# Altium PCB TEMPLATE_PCB_2L.PcbDoc
Units mm, origin at the board's own origin, x right, y up, seen from the top; angles counter-clockwise.
Board outline 50 x 50 mm, 2 copper layers (Top, Bottom), stack 1.54 mm thick; 27 components, 24 nets, 143 pads, 54 vias.
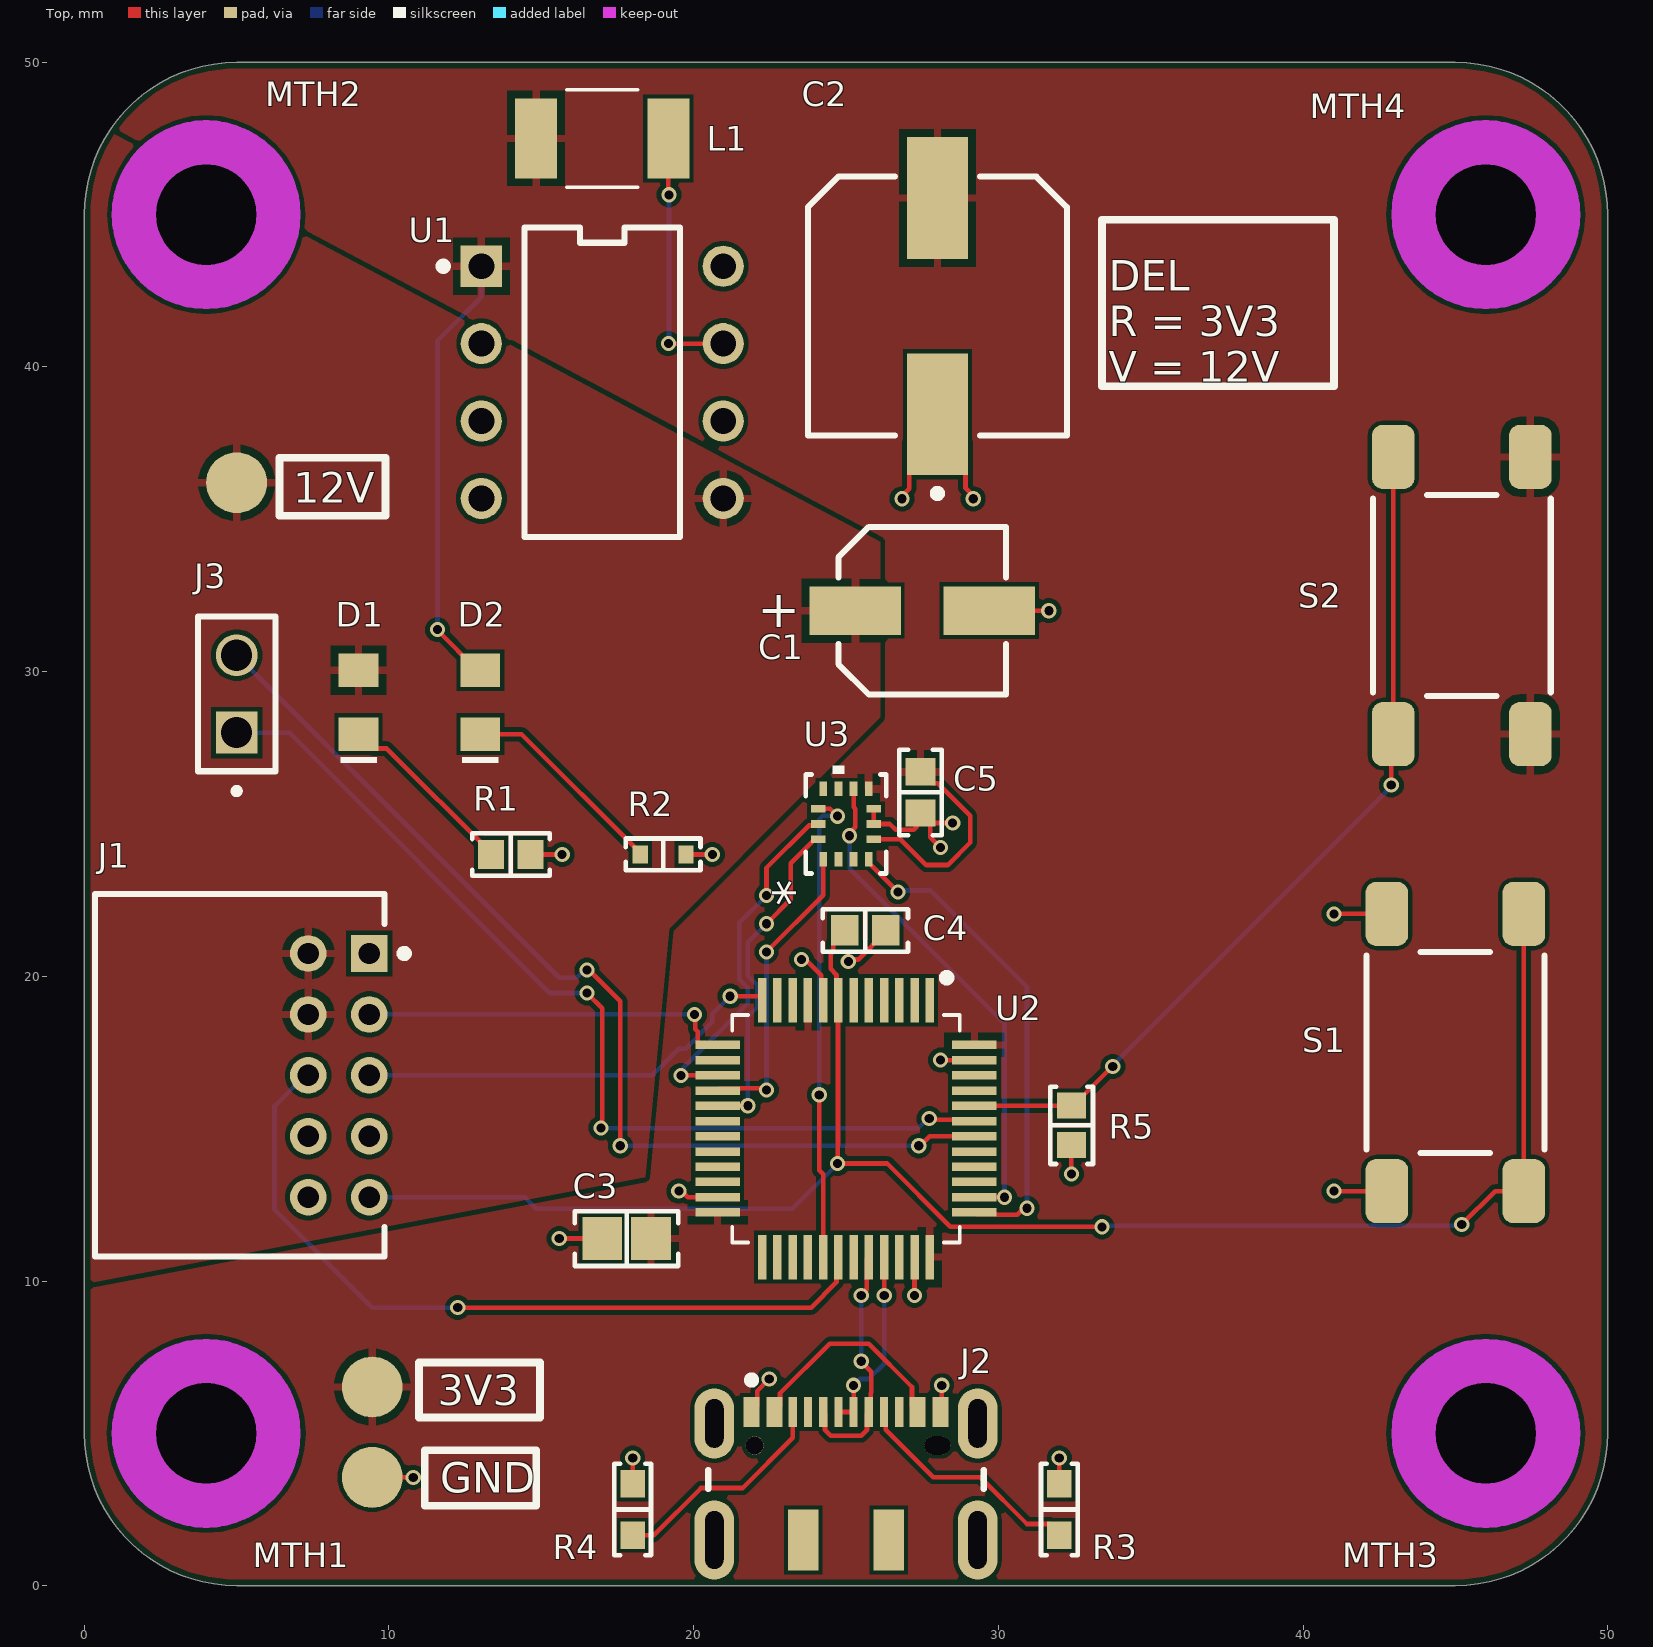
[diagram p0: Top view]
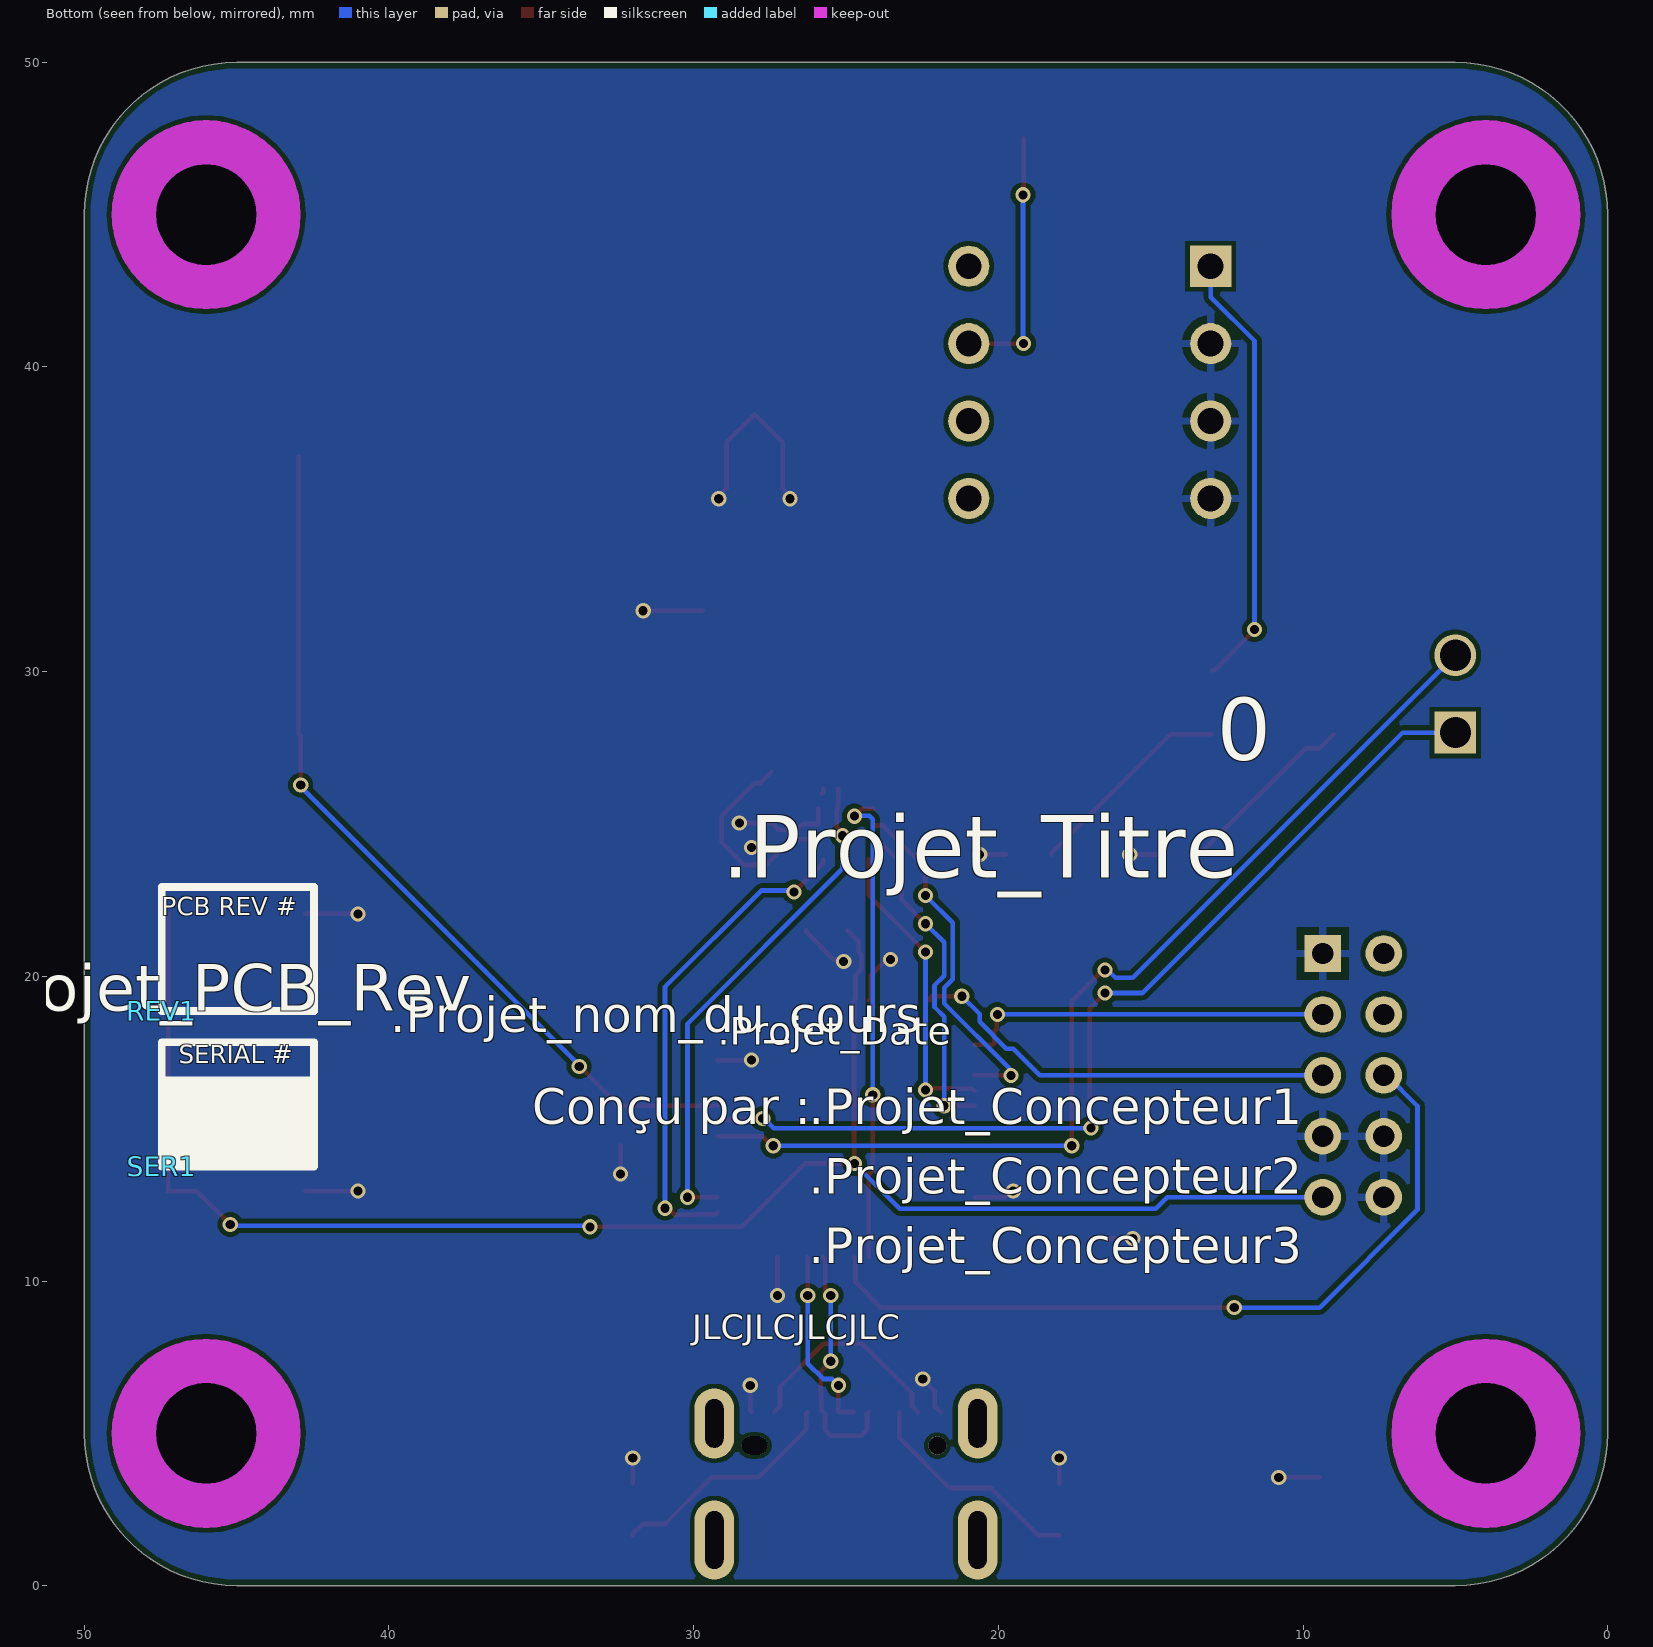
[diagram p1: Bottom view, seen from below]
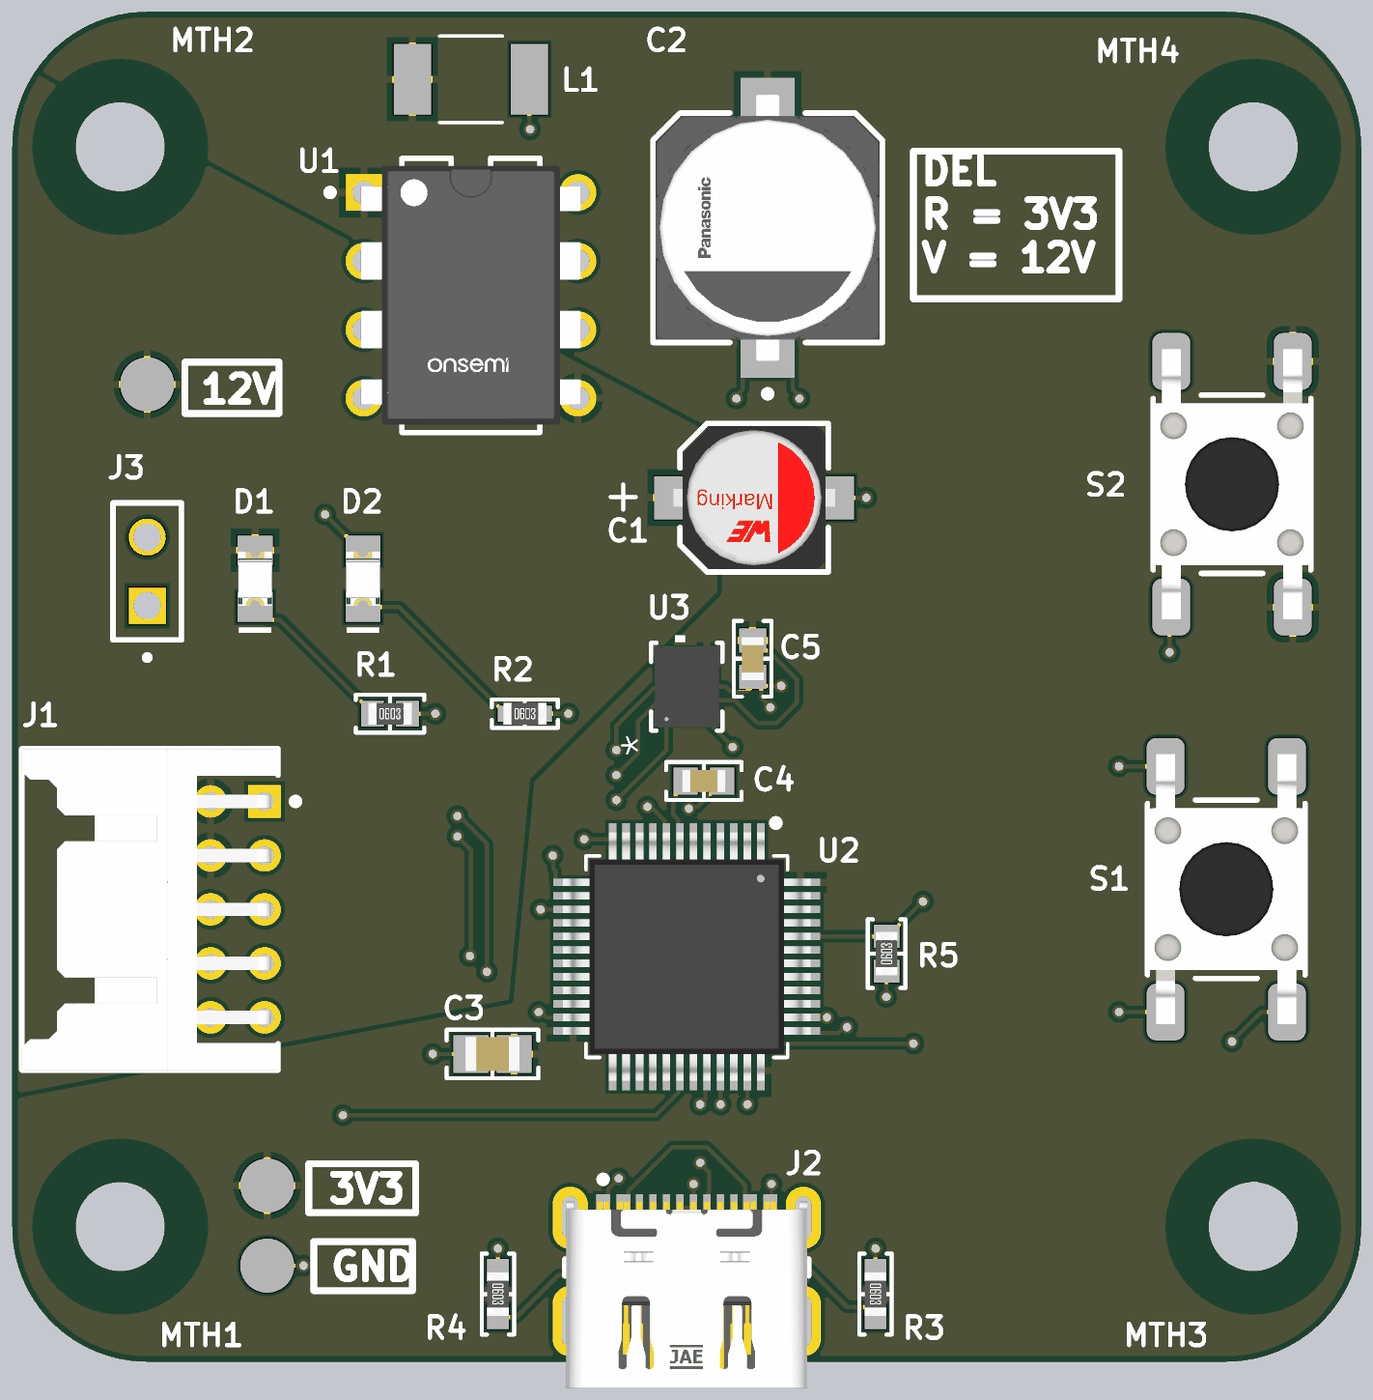
[diagram p2: 3D render of the assembled board from above, using the file's embedded part models]

## Layer stack, top to bottom
Top Solder: solder mask 0.0102, Solder Resist, Dk 3.5
Top: signal copper 0.035
Dielectric 1: core 1.47, FR-4, Dk 4.6
Bottom: signal copper 0.035
Bottom Solder: solder mask 0.0102, Solder Resist, Dk 3.5

## Board outline
0,5 0,45 cw(c5,45) 5,50 45,50 cw(c45,45) 50,45 50,5 cw(c45,5) 45,0 5,0 cw(c5,5)

## Design rules (kind name [scope] priority, off if disabled: settings)
BoardOutlineClearance [All] p1: gap=0.2 ignorepadtopadclearanceinfootprint=FALSE except(0: Arc-SplitContinuation Track-SplitContinuation SMDPad-SplitContinuation THPad-SplitContinuation Via-SplitContinuation Fill-SplitContinuation Poly-SplitContinuation Region-SplitContinuation Text-SplitContinuation)
Clearance "Schematic Clearance Constraint_1" [InComponent('SER1')] p1: gap=0.254 ignorepadtopadclearanceinfootprint=FALSE except(0: Arc-Text Track-Text Text-Text)
Clearance "Schematic Clearance Constraint" [InComponent('REV1')] p2: gap=0.254 ignorepadtopadclearanceinfootprint=FALSE except(0: Arc-Text Track-Text Text-Text)
Clearance [All] p3: gap=0.152 ignorepadtopadclearanceinfootprint=FALSE except(0.127: Arc-Arc Arc-Track Arc-Hole Track-Track Track-Hole SMDPad-Fill SMDPad-Poly SMDPad-Region SMDPad-Hole THPad-Hole Via-Hole Fill-Hole Poly-Hole Region-Hole Text-Hole; 0.2: Arc-SMDPad Track-SMDPad; 0.254: Arc-Via Track-Via Via-Via; 0.33: Arc-THPad Track-THPad; 0.5: THPad-THPad)
ComponentClearance "Schematic Component Clearance Constraint_1" [InComponent('SER1')] p1: gap=0 collisioncheckmode=3 verticalgap=0 showdistances=FALSE
ComponentClearance "Schematic Component Clearance Constraint" [InComponent('REV1')] p2: gap=0 collisioncheckmode=3 verticalgap=0 showdistances=FALSE
ComponentClearance [All] p3: gap=0.102 collisioncheckmode=3 verticalgap=0.102 showdistances=FALSE
HoleSize [All] p1: absolutevalues=TRUE maxlimit=6.3 minlimit=0.3 maxpercent=80.000 minpercent=20.000
HoleToHoleClearance [All] p1: gap=0.45 allowstackedmicrovias=FALSE
MinimumAnnularRing [All] p1: minimumring=0.1
MinimumSolderMaskSliver [All] p1: minsoldermaskwidth=0.1
PlaneClearance [All] p1: clearance=0.152
PlaneConnect [All] p1: pad.planeconnectstyle=Relief pad.reliefexpansion=0.508 pad.reliefentries=4 pad.reliefconductorwidth=0.254 pad.reliefairgap=0.254 via.planeconnectstyle=Direct via.reliefexpansion=0.508 via.reliefentries=4 via.reliefconductorwidth=0.254 via.reliefairgap=0.254
PolygonConnect [All] p1: thpad.connectstyle=Relief thpad.reliefconductorwidth=0.254 thpad.reliefentries=4 thpad.polygonreliefangle="90 Angle" thpad.airgapwidth=0.254 smdpad.connectstyle=Relief smdpad.reliefconductorwidth=0.254 smdpad.reliefentries=4 smdpad.polygonreliefangle="90 Angle" smdpad.airgapwidth=0.254 via.connectstyle=Direct via.reliefconductorwidth=0.254 via.reliefentries=4 via.polygonreliefangle="90 Angle" via.airgapwidth=0.254
RoutingVias [All] p1: holewidth=0.3 width=0.5 viastyle="Through Hole" minholewidth=0.3 minwidth=0.5 maxholewidth=6.3 maxwidth=6.5
SilkToSilkClearance [All] p1: silktosilkclearance=0.102
SilkToSolderMaskClearance [IsPad] p1: minsilkscreentomaskgap=0.024 clearancetoexposedcopper=FALSE
SolderMaskExpansion SolderMaskExpansion_Via [isVia] p1: expansion=0.102 istentingtop=TRUE
SolderMaskExpansion [All] p2: expansion=0.051 istentingtop=FALSE
SupplyNets "Schematic Supply Nets_3" [InNet('3V3')] p1: voltage=0.000
SupplyNets "Schematic Supply Nets_2" [InNet('VUSB')] p2: voltage=0.000
SupplyNets "Schematic Supply Nets_1" [InNet('GND')] p3: voltage=0.000
SupplyNets "Schematic Supply Nets" [InNet('12V')] p4: voltage=0.000
Width [All] p1: maxlimit=25.4 minlimit=0.127 preferedwidth=0.152 minimp=50.000000 maximp=50.000000 favimp=50.000000
22 further rules are at their usual default settings.

## Classes and differential pairs
component class TEMPLATE_Title: REV1 SER1

## Components (designator, comment, footprint, x,y, rotation, side; value= is the part's Value field where it differs from the comment)
C1 "865080442004" WCAP-ASLI_D5H5.5 27.5,32 r180 top
C2 "EEE-1EA221UP" FP-SF-MFG 28,42 r90 top
C3 "1µF" "CAP 0805_2012" 17.8,11.393 r0 top
C4 "0.1 µF" "CAP 0603_1608" 25.635,21.508 r180 top
C5 "0.1 µF" "CAP 0603_1608" 27.445,26.037 r90 top
D1 "150080GS75000" WL-SMCW_0805_150080xx75000 9,29 r90 top
D2 "150080RS75000" WL-SMCW_0805_150080xx75000 13,29 r90 top
J1 "S10B-PHDSS (LF)(SN)" FP-S10B-PHDSS_LF_SN-MFG 5.1,16.75 r90 top
J2 "DX07S016JA1R1500" FP-DX07S016JA1R1500-MFG 25,2.5 r0 top
J3 "TSW-102-23-T-S" SAMTEC_TSW-102-23-T-S 5,28 r90 top
L1 "B82432C1334K000" INDM4532X340N 17,47.5 r180 top
MTH1 "MTH_M3_NON_PLATED" MTH_M3_NON_PLATED 4,5 r0 top
MTH2 "MTH_M3_NON_PLATED" MTH_M3_NON_PLATED 4,45 r0 top
MTH3 "MTH_M3_NON_PLATED" MTH_M3_NON_PLATED 46,5 r0 top
MTH4 "MTH_M3_NON_PLATED" MTH_M3_NON_PLATED 46,45 r0 top
R1 "2 kOhms" "RES 0603_1608" 14,24 r0 top
R2 "270 Ohms" "KOA RES RK73 RN73 0603_1608" 19,24 r0 top
R3 "5.1 kOhms" "YAGEO RES 0603_1608" 32,2.5 r270 top
R4 "5.1 kOhms" "YAGEO RES 0603_1608" 18,2.5 r270 top
R5 "" "RES 0603_1608" 32.408,15.11 r90 top value="100 kOhms"
REV1 "Revision Cartridge Mini" REV_REVISION_CARTRIDGE_MINI 47.462,18.861 r180 bottom
S1 "FSM4JSMA" "TE FSM4JSMA" 45,17.5 r180 top
S2 "FSM4JSMA" "TE FSM4JSMA" 45.212,32.5 r0 top
SER1 "Serial Cartridge MICRO" SER_SERIAL_CARTRIDGE_MICRO 47.462,13.76 r180 bottom
U1 "LM2574N-ADJG" FP-626-05-MFG 17,39.497 r0 top
U2 "STM32U083CCT6" STM32U083CCT6-Footprint-1 25,15 r270 top
U3 "BMI323" BMI323_BOS 25,25 r90 top

## Footprints (in the part's own frame and the unit in brackets; to place one, negate y for a bottom-side part, rotate by r counter-clockwise, add the part's x,y. Pads: shape width x height; smd on the part's side, far side on the other; paste and mask are expansions set on the pad)
BMI323_BOS [mil]
  rect 19x10 smd paste+0 mask+0: 1(-45.5,29.53) 2(-45.5,9.84) 3(-45.5,-9.84) 4(-45.5,-29.53) 8(45.5,-29.53) 9(45.5,-9.84) 10(45.5,9.84) 11(45.5,29.53)
  rect 10x19 smd paste+0 mask+0: 5(-19.69,-36) 6(0,-36) 7(19.69,-36) 12(19.69,36) 13(0,36) 14(-19.69,36)
  silkscreen extent -64,-52 75,52, body extent -59,-47 59,47, height 34
"CAP 0603_1608" [mm] "Chip Capacitor, 2-Leads, Body 1.60x0.80mm, IPC Medium Density"
  rect 0.9x1 smd: 1(-0.675,0) 2(0.675,0)
  silkscreen extent -1.4,-0.7 1.4,0.7, body extent -0.8,-0.41 0.8,0.41, height 0.82
"CAP 0805_2012" [mm] "Chip Capacitor, 2-Leads, Body 2.00x1.20mm, IPC Medium Density"
  rect 1.3x1.4 smd: 1(-0.8,0) 2(0.8,0)
  silkscreen extent -1.7,-0.9 1.7,0.9, body extent -1,-0.64 1,0.64, height 1.26
FP-626-05-MFG [mm]
  rect 1.35x1.35 hole 0.85 paste-2539.97 mask+0: 1(-3.97,3.81)
  round 1.35 hole 0.85 paste-2539.97 mask+0: 2(-3.97,1.27) 3(-3.97,-1.27) 4(-3.97,-3.81) 5(3.97,-3.81) 6(3.97,-1.27) 7(3.97,1.27) 8(3.97,3.81)
  silkscreen extent -5.34,-5.08 2.56,5.08, body extent -4.08,-4.79 4.08,4.79, height 5.33
FP-DX07S016JA1R1500-MFG [mm]
  rrect100% 1.3x2.3 hole 1.6 slot 0.6 at 0 deg paste-2539.97 mask+0: 1(-4.32,2.825) 2(4.32,2.825)
  rrect100% 1.3x2.6 hole 1.9 slot 0.6 at 0 deg paste-2539.97 mask+0: 3(-4.32,-1) 6(4.32,-1)
  rect 1x2 smd paste+0 mask+0: 4(-1.4,-1) 5(1.4,-1)
  rect 0.52x1 smd paste+0 mask+0: A1/B12(-3.1,3.2) A4/B9(-2.35,3.2) A12/B1(3.1,3.2) B4/A9(2.35,3.2)
  rect 0.27x1 smd paste+0 mask+0: A5(-1.75,3.2) A6(-0.25,3.2) A7(0.75,3.2) A8(1.75,3.2) B5(1.25,3.2) B6(0.25,3.2) B7(-0.75,3.2) B8(-1.25,3.2)
  round 0.6 hole 0.6 unplated paste-2539.97 mask+0: ""(-3,2.1)
  rrect100% 0.85x0.6 hole 0.6 slot 0.85 at 0 deg unplated paste-2539.97 mask+0: ""(3,2.1)
  silkscreen extent -4.52,0.67 4.52,4.37, body extent -5.07,-3.75 5.07,4.08, height 0.25
FP-S10B-PHDSS_LF_SN-MFG [mm]
  rect 1.2x1.2 hole 0.7 paste-2539.97 mask+0: 1(4,-4.25)
  round 1.2 hole 0.7 paste-2539.97 mask+0: 2(4,-2.25) 3(2,-4.25) 4(2,-2.25) 5(0,-4.25) 6(0,-2.25) 7(-2,-4.25) 8(-2,-2.25) 9(-4,-4.25) 10(-4,-2.25)
  silkscreen extent -5.95,-5.53 5.95,4.75, body extent -6.05,-4.95 6.05,4.85, height 0.25
FP-SF-MFG [mm]
  rect 4x2 smd paste+0 mask+0: 1(-3.55,0) 2(3.55,0)
  silkscreen extent -6.27,-4.25 4.25,4.25, body extent -5.8,-4.5 5.8,4.5, height 0.25
INDM4532X340N [mm]
  rect 1.38x2.61 smd: 1(-2.17,0) 2(2.17,0)
  silkscreen extent -1.16,-1.6 1.16,1.6
"KOA RES RK73 RN73 0603_1608" [mm] "Chip Resistor, 2-Leads, Body 1.60x0.80mm"
  rect 0.5x0.6 smd: 1(-0.75,0) 2(0.75,0)
  silkscreen extent -1.22,-0.52 1.22,0.52, body extent -0.8,-0.4 0.8,0.4, height 0.45
MTH_M3_NON_PLATED [mm] "Mounting Hole Metric M3 NON_PLATED"
  round 0 hole 3.3 unplated paste-2539.97 mask+0.07: 1(0,0)
  Top keep-out circle w1.45: c0,0 r2.375
  Bottom keep-out circle w1.45: c0,0 r2.375
"RES 0603_1608" [mm] "Chip Resistor, 2-Leads, Body 1.60x0.80mm, IPC Medium Density"
  rect 0.85x0.95 smd: 1(-0.65,0) 2(0.65,0)
  silkscreen extent -1.27,-0.7 1.27,0.7, body extent -0.8,-0.4 0.8,0.4, height 0.45
REV_REVISION_CARTRIDGE_MINI [mm]
  silkscreen extent 0,0 5,4.08
SAMTEC_TSW-102-23-T-S [mm]
  rect 1.37x1.37 hole 1.02: 01(0,0)
  round 1.37 hole 1.02: 02(2.54,0)
  silkscreen extent -2.02,-1.27 3.81,1.27
SER_SERIAL_CARTRIDGE_MICRO [mm]
  silkscreen extent 0,0 5.02,4.08
STM32U083CCT6-Footprint-1 [mil]
  rect 57.56x11 smd paste+0 mask+0: 1(-166,108.27) 2(-166,88.58) 3(-166,68.9) 4(-166,49.21) 5(-166,29.53) 6(-166,9.84) 7(-166,-9.84) 8(-166,-29.53) 9(-166,-49.21) 10(-166,-68.9) 11(-166,-88.58) 12(-166,-108.27) 25(166,-108.27) 26(166,-88.58) 27(166,-68.9) 28(166,-49.21) 29(166,-29.53) 30(166,-9.84) 31(166,9.84) 32(166,29.53) 33(166,49.21) 34(166,68.9) 35(166,88.58) 36(166,108.27)
  rect 11x57.56 smd paste+0 mask+0: 13(-108.27,-166) 14(-88.58,-166) 15(-68.9,-166) 16(-49.21,-166) 17(-29.53,-166) 18(-9.84,-166) 19(9.84,-166) 20(29.53,-166) 21(49.21,-166) 22(68.9,-166) 23(88.58,-166) 24(108.27,-166) 37(108.27,166) 38(88.58,166) 39(68.9,166) 40(49.21,166) 41(29.53,166) 42(9.84,166) 43(-9.84,166) 44(-29.53,166) 45(-49.21,166) 46(-68.9,166) 47(-88.58,166) 48(-108.27,166)
  silkscreen extent -200,-147 147,147, body extent -181,-181 181,181, height 63
"TE FSM4JSMA" [mm]
  rrect50% 1.4x2.1 smd: 1(2.25,4.55) 2(2.25,-4.55) 3(-2.25,4.55) 4(-2.25,-4.55)
  silkscreen extent -2.92,-3.3 2.92,3.3, body extent -3,-5 3,5, height 5.08
WCAP-ASLI_D5H5.5 [mm] "Aluminium Electrolytic V-Chip SMT Capacitors, 5x5.5mm"
  rect 3x1.6 smd: 1(2.2,0) 2(-2.2,0)
  silkscreen extent -2.75,-2.75 2.75,2.75, body extent -3,-2.65 3,2.65, height 5.5
WL-SMCW_0805_150080xx75000 [mm] "SMD Mono-color Chip LED, body 2.0x1.25mm"
  rect 1.1x1.3 smd: 1(-1.05,0) 2(1.05,0)
  silkscreen extent -2,-0.6 -1.8,0.6, body extent -1,-0.63 1,0.62, height 0.7
"YAGEO RES 0603_1608" [mm] "Chip Resistor, 2-Leads, Body 1.60x0.80mm"
  rect 0.9x0.8 smd: 1(-0.85,0) 2(0.85,0)
  silkscreen extent -1.5,-0.6 1.5,0.6, body extent -0.8,-0.4 0.8,0.4, height 0.45

## Part data
C1: library part CMP-03913-53914587-2, "WCAP-ASLI Aluminum Electrolytic Capacitors", Capacitance=22µF, Case/Package=Radial, ESR (Equivalent Series Resistance)=942.169mΩ, Insulation Resistance=4.54545MΩ, Leakage Current=5.5µA, Max Operating Temperature=105°C, Min Operating Temperature=-55°C, Ripple Current=145mA, Tolerance=20%, Voltage Rating=25V, Diameter=5mm, Height=5.5mm, Height - Seated (Max)=5.5118mm, Impedance=1.2Ω, Length=5.5mm, Life (Hours)=2000hours, Mount="Surface Mount", Polarity=Polar, REACH SVHC=Unknown, Ripple Current (AC)=145mA, RoHS=Compliant, Voltage Rating (DC)=25V, Width=5.3mm
C2: library part CMP-05427-000064-1, "CAP ALUM 220UF 20% 25V SMD", Capacitance=220uF, Case/Package=Radial, Leakage Current=3uA, Max Operating Temperature=85°C, Min Operating Temperature=-40°C, Package Quantity=1, Ripple Current=230mA, Tolerance=20%, Voltage=25V, Construction=Cylindrical, Contact Plating=Tin, Diameter=8mm, Height=10.2mm, Height - Seated (Max)=0.402inch, Lead Free="Lead Free", Length=10.5mm, Life (Hours)=2000Hour, Mount="Surface Mount", packaging="Tape and Reel", Radiation Hardening=No, Ripple Current (AC)=230mA, RoHS Compliant=Yes, series=S, Termination=SMD/SMT, Voltage Rating=25V, Voltage Rating (DC)=25V
C3: library part MM05ZC105KCZ2A, "CAP CER 1UF 10V X7R 0805", Device Package="0805 (2012 Metric)", manufacturer="AVX Corporation", Operating Temperature="-55°C ~ 125°C", Supplier Part Number 1=478-10611-1-ND, Temperature Coefficient=X7R, Tolerance=±10%, Voltage - Rated=10V, Applications="Medical, Non-Critical", Capacitance=1µF, componentlink1description=Datasheet, componentlink1url=http://datasheets.avx.com/AVX-MM.pdf, componentlink2description="DigiKey Link", componentlink2url=http://digikey.com/product-detail/en/avx-corporation/MM05ZC105KCZ2A/478-10611-1-ND/7344872, lastupdated="2020-09-02 01:04:42", Lifecycle Status=Active, Minimum Order=1, Mounting Type="Surface Mount, MLCC", Package / Case="0805 (2012 Metric)", packaging=TapeAndReel, Part Number=MM05ZC105KCZ2A, Part Status=Active, partid=2439, price=0.50, series=MM, Size / Dimension="0.079\" L x 0.049\" W (2.01mm x 1.25mm)", Supplier 1=DigiKey, Thickness (Max)="0.029\" (0.74mm)"
C4 C5: library part C0603C104K5RAC7411, "CAP CER 0.1UF 50V X7R 0603", Device Package="0603 (1608 Metric)", manufacturer=KEMET, Operating Temperature="-55°C ~ 125°C", Supplier Part Number 1=399-C0603C104K5RAC7411CT-ND, Temperature Coefficient=X7R, Tolerance=±10%, Voltage - Rated=50V, Applications="Bypass, Decoupling", Capacitance="0.1 µF", componentlink1description=Datasheet, componentlink1url=https://api.kemet.com/component-edge/download/datasheet/C0603C104K5RAC7411.pdf, componentlink2description="DigiKey Link", componentlink2url=https://www.digikey.com/en/products/detail/kemet/C0603C104K5RAC7411/3317013, lastupdated="2024-02-09 20:10:30", Lifecycle Status=Active, Minimum Order=1, Mounting Type="Surface Mount, MLCC", Package / Case="0603 (1608 Metric)", packaging=TapeAndReel, Part Number=C0603C104K5RAC7411, Part Status=Active, partid=2233, price=0.01, series="SMD Comm X7R", Size / Dimension="0.063\" L x 0.031\" W (1.60mm x 0.80mm)", Supplier 1=DigiKey, Thickness (Max)="0.035\" (0.90mm)"
D1: library part CMP-1426-00007-3, "WURTH ELEKTRONIK - 150080GS75000 - LED, Green, SMD, 0805, 30 mA, 3.2 V, 520 nm", Case Code (Imperial)=0805, Case Code (Metric)=2012, Color=Green, Forward Current=100mA, Forward Voltage=3.2V, Max Junction Temperature (Tj)=95°C, Max Operating Temperature=85°C, Max Reverse Voltage (DC)=5V, Min Operating Temperature=-40°C, Power Dissipation=105mW, Test Current=20mA, Case/Package=0805, Dominant Wavelength=525nm, Height=700µm, Length=2mm, Lens Style="Clear, Rectangular", Luminous Intensity=450mcd, Mount="Surface Mount", packaging="Tape and Reel", Peak Wavelength=515nm, REACH SVHC=Unknown, Reverse Voltage=5V, RoHS=Compliant, Viewing Angle=140°, Wavelength=525nm, Width=1.25mm
D2: library part CMP-1426-00011-3, "LED Uni-Color Red 630nm 2-Pin Chip 0805(2012Metric) T/R", Case Code (Imperial)=0805, Case Code (Metric)=2012, Color=Red, Forward Current=100mA, Forward Voltage=2V, Max Junction Temperature (Tj)=95°C, Max Operating Temperature=85°C, Max Reverse Voltage (DC)=5V, Min Operating Temperature=-40°C, Power Dissipation=72mW, Test Current=20mA, Case/Package=0805, Dominant Wavelength=625nm, Height=700µm, Length=2mm, Lens Style="Clear, Rectangular", Luminous Intensity=150mcd, Mount="Surface Mount", packaging="Tape and Reel", Peak Wavelength=630nm, REACH SVHC=Unknown, RoHS=Compliant, Viewing Angle=140°, Wavelength=625nm, Width=1.25mm
J1: library part CMP-17439-000374-2, "CONN HEADER R/A 10POS 2MM", Color=Natural, Contact Resistance=20mR, Current Rating=3A, Flammability Rating="UL94 V-0", Housing Color=Beige, Max Operating Temperature=85°C, Max Voltage Rating (AC)=250V, Min Operating Temperature=-25°C, Connector Type=Header, Contact Finish - Mating=TIN, Contact Material="Copper Alloy", Contact Mating Length=0.114inch, Contact Plating=Copper, Contact Shape=Square, Contact Type="Male Pin", Depth=9.5mm, Fastening Type=Detent, Gender=Male, Height=9.5mm, Housing Material=Polyamide, Insulation Color=Natural, Insulation Material=Nylon, Lead Free="Lead Free", Length=11.9mm, Max Current Rating=3A, Mount="Through Hole", Number of Contacts=10, Number of Positions=10, Number of Rows=2, Orientation="Right Angle", packaging=Bulk, Pitch=2mm, Row Spacing=0.079inch, series=PHD, Termination=Solder, Voltage Rating=250V, Width=5mm
J2: library part CMP-19038-000003-1, "CONN RCP USB2.0 TYP C 24P SMD RA"
J3: "Connector Header Through Hole 2 position 0.100 (2.54mm)", Package=None, Availability=Bad, MF=Samtec, MP=TSW-102-23-T-S, price=None, Purchase-URL=https://pricing.snapeda.com/search/part/TSW-102-23-T-S/?ref=eda, SnapEDA_Link=https://www.snapeda.com/parts/TSW-102-23-T-S/Samtec/view-part/4795093/?ref=snap
L1: "INDUCTOR, 1812C, 330UH, 0.085A, 10%; Inductance: 330µH; Product Range: -; DC Current Rating: 85mA; Inductor Construction: Wirewound; DC Resistance Max: 14.1ohm; Inductance Tolerance: ± 10%; Self Resonant Frequency Min: 4.5MHz;", Package=None, Check_prices=https://www.snapeda.com/parts/B82432C1334K000/TDK/view-part/?ref=eda, MF="TDK Electronics", MP=B82432C1334K000, SnapEDA_Link=https://www.snapeda.com/parts/B82432C1334K000/TDK/view-part/?ref=snap
MTH1 MTH2 MTH3 MTH4: library part CMP-006-000010-2, "MTH - MOUNTING HOLE M3 NON-PLATED - M3", Package=M3, Assembly Type=NONE, Component Type="Standard (No BOM)", Design Item ID=MTH_M3_NON_PLATED, HelpURL=https://littlemachineshop.com/images/gallery/PDF/TapDrillSizes.pdf, Pin Count=0, Source=CEGEP_SHERBROOKE_TGE_LIBRARY.SchLib
R1: library part RMCF0603FT2K00, "RES 2K OHM 1% 1/10W 0603", Device Package="0603 (1608 Metric)", manufacturer="Stackpole Electronics Inc", Operating Temperature="-55°C ~ 155°C", Power (Watts)="0.1W, 1/10W", Ratings=AEC-Q200, Supplier Device Package=0603, Supplier Part Number 1=RMCF0603FT2K00CT-ND, Temperature Coefficient=±100ppm/°C, Tolerance=±1%, componentlink1description=Datasheet, componentlink1url=https://www.seielect.com/catalog/sei-rmcf_rmcp.pdf, componentlink2description="DigiKey Link", componentlink2url=https://www.digikey.com/en/products/detail/stackpole-electronics-inc/RMCF0603FT2K00/1761334, Composition="Thick Film", Features="Automotive AEC-Q200", Height - Seated (Max)="0.022\" (0.55mm)", lastupdated="2024-02-09 20:43:32", Lifecycle Status=Active, Minimum Order=1, Number of Terminations=2, Package / Case="0603 (1608 Metric)", packaging=CutTape, Part Number=RMCF0603FT2K00, Part Status=Active, partid=6085, price=0.01, Resistance="2 kOhms", series=RMCF, Size / Dimension="0.061\" L x 0.031\" W (1.55mm x 0.80mm)", Supplier 1=DigiKey
R2: library part RK73H1JTTD2700F, "RES 270 OHM 1% 1/8W 0603", Device Package="0603 (1608 Metric)", manufacturer="KOA Speer Electronics, Inc.", Operating Temperature="-55°C ~ 155°C", Power (Watts)="0.125W, 1/8W", Ratings=AEC-Q200, Supplier Device Package=0603, Supplier Part Number 1=2019-RK73H1JTTD2700FCT-ND, Temperature Coefficient=±100ppm/°C, Tolerance=±1%, componentlink1description=Datasheet, componentlink1url=http://www.koaspeer.com/catimages/Products/RK73H/RK73H.pdf, componentlink2description="DigiKey Link", componentlink2url=https://www.digikey.com/en/products/detail/koa-speer-electronics-inc/RK73H1JTTD2700F/9845010, Composition="Thick Film", Features="Automotive AEC-Q200", Height - Seated (Max)="0.022\" (0.55mm)", lastupdated="2024-07-25 09:43:09", Lifecycle Status=Active, Minimum Order=1, Number of Terminations=2, Package / Case="0603 (1608 Metric)", packaging=CutTape, Part Number=RK73H1JTTD2700F, Part Status=Active, partid=6149, price=0.01, Resistance="270 Ohms", series=RK73H, Size / Dimension="0.063\" L x 0.031\" W (1.60mm x 0.80mm)", Supplier 1=DigiKey
R3 R4: library part AC0603FR-075K1L, "RES SMD 5.1K OHM 1% 1/10W 0603", Device Package="0603 (1608 Metric)", manufacturer=Yageo, Operating Temperature="-55°C ~ 155°C", Power (Watts)="0.1W, 1/10W", Ratings=AEC-Q200, Supplier Device Package=0603, Supplier Part Number 1=YAG3621CT-ND, Temperature Coefficient=±100ppm/°C, Tolerance=±1%, componentlink1description=Datasheet, componentlink1url=https://www.yageo.com/upload/media/product/productsearch/datasheet/rchip/PYu-AC_51_RoHS_L_7.pdf, componentlink2description="DigiKey Link", componentlink2url=https://www.digikey.com/en/products/detail/yageo/AC0603FR-075K1L/5896209, Composition="Thick Film", Features="Automotive AEC-Q200, Moisture Resistant", Height - Seated (Max)="0.022\" (0.55mm)", lastupdated="2024-07-25 09:19:23", Lifecycle Status=Active, Minimum Order=1, Number of Terminations=2, Package / Case="0603 (1608 Metric)", packaging=CutTape, Part Number=AC0603FR-075K1L, Part Status=Active, partid=17442, price=0.01, Resistance="5.1 kOhms", series=AC, Size / Dimension="0.063\" L x 0.031\" W (1.60mm x 0.80mm)", Supplier 1=DigiKey
  R3: ComponentLink3Description="New link"
R5: library part RCS0603100KFKEA, "RES SMD 100K OHM 1% 1/4W 0603", Part Number=RCS0603100KFKEA
REV1: library part REV_REVISION_CARTRIDGE_MINI, "REV - REVISION CARTRIDGE MINI", Assembly Type=NONE, Rule="Component Clearance Constraint [Horizontal Clearance = 0mil    Vertical Clearance = 0mil]"
S1 S2: "SWITCH TACTILE SPST-NO 0.05A 24V", Contact Rating @ Voltage="0.05A @ 24VDC", manufacturer="TE Connectivity ALCOSWITCH Switches", Operating Force=160gf, Operating Temperature="-35°C ~ 85°C", Supplier Part Number 1=450-1129-ND, Actuator Height off PCB, Vertical=5.00mm, Actuator Orientation="Top Actuated", Actuator Type=Standard, Circuit=SPST-NO, componentlink1description=Datasheet, componentlink1url=https://www.te.com/commerce/DocumentDelivery/DDEController?Action=srchrtrv&DocNm=1308111-1_SWITCHES_CORE_PROGRAM_CATALOG&DocType=CS&DocLang=English, componentlink2description="DigiKey Link", componentlink2url=https://www.digikey.com/en/products/detail/te-connectivity-alcoswitch-switches/FSM4JSMA/525821, Illumination=Non-Illuminated, lastupdated="2024-06-03 20:19:31", Lifecycle Status=Active, Minimum Order=1, Mounting Type="Surface Mount", Outline="6.00mm x 6.00mm", packaging=Bulk, Part Number=FSM4JSMA, Part Status=Active, price=0.14, series=FSMJSMA, Supplier 1=DigiKey, Switch Function=Off-Mom, Termination Style="Gull Wing"
SER1: library part SER_SERIAL_CARTRIDGE_MICRO, "SER - SERIAL CARTRIDGE MICRO", Assembly Type=NONE, Rule="Component Clearance Constraint [Horizontal Clearance = 0mil    Vertical Clearance = 0mil]"
U1: library part CMP-00278-46513304-1, "LM2574N-ADJG Buck Regulator, Switching, Adjustable Output Voltage, 0.5 A Adjustable 1.23 V to 37 V", Case/Package=PDIP, Frequency=52kHz, Manufacturer Lifecycle Status=ACTIVE, Max Input Voltage=40V, Max Operating Temperature=125°C, Max Output Current=500mA, Max Output Voltage=37V, Min Input Voltage=4.75V, Min Operating Temperature=-40°C, Min Output Voltage=1.23V, Quiescent Current=9mA, Efficiency=77%, Height=3.44mm, Lead Free="Lead Free", Length=10.16mm, Lifecycle Status=Production, Max Duty Cycle=98%, Mount="Through Hole", NexarPartId=46513304, Number of Channels=1, Number of Outputs=1, Number of Pins=8, Operating Supply Voltage=40V, Output Current=500mA, Output Type=Adjustable, Output Voltage=37V, Radiation Hardening=No, REACH SVHC="No SVHC", RoHS=Compliant, Schedule B="8542390000, 8542390000", Switching Frequency=52kHz, Synchronous Rectifier=No, Width=6.6mm
U2: library part CMP-005-000031-1, "MCU 32-bit ARM Cortex M0+ RISC 256KB Flash 2.5V/3.3V 48-Pin LQFP Tray"
U3: "Description", Manufacturer_Name="Bosch Sensortec", Copyright="Copyright (C) 2026 Ultra Librarian. All rights reserved.", Manufacturer_Part_Number=BMI323, RefDes=RefDes, Type=Type

## Free pads (board coordinates)
  round 2 smd: 3(5,36.2) 4(9.45,6.52) 5(9.45,3.555)

## Via types
v1: diameter 0.5, hole 0.3, Top to Bottom, tented both sides, 54 vias

## Nets (pads, with @x,y where several pads share a name; then routed paths per layer and width w, separated by ;. In a path a pad name is that pad's centre, name@x,y a point inside that pad or via, vN(x,y) a via of type N, cw(c..) or ccw(c..) an arc to the next point about the centre after c; other vN are vias at no path point)
3V3: C2.2 C3.2 C5.2 D2.2 L1.2 pad.4 S2.1 S2.2 U1.1 U2.9 U2.24 U2.36 U2.48 U3.5 U3.8 | length 21.6
  Top w0.152: v1(11.593,31.38) 11.593,31.357 12.9,30.05 D2.2 ; U3.8 25.75,26.041 U3.8@25.801,25.991 ; U3.5 26.786,24.5 27.634,23.653 28.34,23.653 29.08,24.393 29.08,25.271 28.013,26.338 27.819,26.338 C5.2
  Bottom w0.152: v1(11.593,31.38) 11.593,40.859 13.03,42.296 U1.1
12V: C1.1 D1.2 J1.2 J1.4 pad.3 U1.5
CSB: U2.29 U3.12 | length 15.8
  Top w0.152: U3.12 24.474,25.5 24.717,25.257 v1(24.724,25.257) ; v1(24.123,16.11) 24.123,13.638 24.25,13.511 U2.29
  Bottom w0.152: v1(24.123,16.11) 24.123,25.16 24.231,25.268 24.714,25.268 v1(24.724,25.257)
GND: C1.2 C2.1 C3.1 C4.1 C5.1 J1.1 J1.7 J1.8 J1.10 J2.A1/B12 J2.A12/B1 pad.5 R1.2 R2.2 R3.1 R4.1 R5.1 S1.1 S1.2 U1.2 U1.3 U1.4 U2.8 U2.23 U2.35 U2.47 U3.6 U3.7 | length 33.1
  Top w0.152: pad.5 v1(10.795,3.555) ; U1.4@13.024,35.681 U1.4 ; R1.2 v1(15.684,24) ; v1(15.587,11.393) C3.1 ; R4.1 v1(18,4.191) ; v1(19.514,12.95) 19.608,12.95 19.808,12.75 U2.23 ; R2.2 v1(20.613,24) ; J2.A1/B12 22.084,5.884 22.084,6.391 v1(22.479,6.786) ; v1(23.543,20.551) 23.609,20.484 23.744,20.484 24.186,20.041 24.186,19.28 U2.8 ; v1(25.076,20.484) 25.143,20.551 25.403,20.551 26.31,21.458 C4.1 ; U3.7 U3.6 26.441,25 26.628,24.813 27.22,24.813 C5.1@27.441,25.034 ; v1(26.842,35.675) 26.842,35.769 27.076,36.004 27.076,37.526 C2.1 28.924,37.526 28.924,36.022 29.176,35.769 v1(29.176,35.675) ; v1@27.22,9.557 v1(27.25,9.527) U2.35 ; J2.A12/B1 28.144,5.744 v1(28.144,6.575) ; v1(28.1,17.25) 28.126,17.224 28.252,17.224 28.278,17.25 U2.47 ; v1(28.1,24.233) 27.762,24.571 27.762,24.988 27.715,25.034 C5.1@27.441,25.034 ; v1(28.5,25.03) 27.445,25.03 C5.1@27.441,25.034 ; C1.2 v1(31.658,32) ; R3.1 v1(32,4.191) ; v1(32.398,13.511) 32.398,14.45 R5.1 ; v1(41.021,12.95) S1.1 ; v1(41.021,22.05) S1.2
GPIO18: J1.6 U2.30 | length 25.8
  Top w0.152: v1(12.255,9.127) 23.855,9.127 24.687,9.959 24.687,10.72 U2.30
  Bottom w0.152: J1.6@7.25,16.75 6.244,15.744 6.244,12.333 9.45,9.127 v1(12.255,9.127)
INT1: U2.37 U3.4 | length 16.2
  Top w0.152: U3.4 25.75,23.73 26.704,22.776 v1(26.704,22.765) ; U2.37 29.28,12.187 29.944,12.187 29.961,12.17 30.626,12.17 30.846,12.39 v1(30.94,12.39)
  Bottom w0.152: v1(26.704,22.765) 26.754,22.815 27.777,22.815 30.94,19.652 v1(30.94,12.39)
INT2: U2.38 U3.9 | length 16.6
  Top w0.152: v1(25.118,24.614) 25.118,24.708 25.304,24.895 25.304,25.498 25.25,25.552 U3.9 ; U2.38 v1(30.201,12.75)
  Bottom w0.152: v1(25.118,24.614) 25.118,23.53 30.201,18.447 v1(30.201,12.75)
"MCU RX": J1.5 U2.12 | length 14.3
  Top w0.152: v1(21.197,19.348) 22.187,19.348 22.25,19.285 U2.12
  Bottom w0.152: J1.5@9.25,16.75 9.252,16.748 18.634,16.748 19.514,17.627 19.734,17.627 20.613,18.507 20.613,18.765 v1(21.197,19.348)
"MCU TX": J1.3 U2.13 | length 12.4
  Top w0.152: v1(20.03,18.744) 20.053,18.722 20.053,18.266 20.129,18.189 20.129,17.814 20.192,17.75 U2.13
  Bottom w0.152: J1.3@9.25,18.75 20.025,18.75 v1(20.03,18.744)
MISO: U2.16 U3.1 | length 10
  Top w0.152: U2.16 20.847,16.314 21.521,16.314 21.537,16.33 22.33,16.33 v1(22.39,16.27) ; v1(22.39,20.802) 24.25,22.662 U3.1
  Bottom w0.152: v1(22.39,16.27) v1(22.39,20.802)
MOSI: U2.17 U3.14 | length 11
  Top w0.152: U2.17 v1(21.778,15.75) ; v1(22.39,21.725) 23.188,22.524 23.188,23.717 23.971,24.5 U3.14
  Bottom w0.152: v1(21.778,15.75) 21.778,18.676 22.094,18.992 22.094,19.704 21.778,20.021 21.778,21.113 v1(22.39,21.725)
NetD1_1: D1.1 R1.1 | length 6
  Top w0.152: D1.1 9.474,27.476 9.924,27.476 13.35,24.05 R1.1
NetD2_1: D2.1 R2.1 | length 6.9
  Top w0.152: D2.1 14.35,27.95 18.25,24.05 R2.1
NetJ2_A5: J2.A5 R4.2 | length 7.4
  Top w0.152: R4.2 18.686,1.65 20.243,3.206 21.605,3.206 23.25,4.851 J2.A5
NetJ2_B5: J2.B5 R3.2 | length 7.8
  Top w0.152: J2.B5 26.309,5.641 26.309,5.116 27.87,3.555 29.409,3.555 30.94,2.024 31.676,2.024 32,1.7 R3.2
NetL1_1: L1.1 U1.7 | length 8.6
  Top w0.152: v1(19.17,40.767) U1.7 ; L1.1 19.17,45.672 v1(19.192,45.65)
  Bottom w0.152: v1(19.17,40.767) 19.192,40.789 v1(19.192,45.65)
NetR5_2: R5.2 S2.3 S2.4 U2.44 | length 28.9
  Top w0.152: U2.44 32.398,15.75 R5.2 32.458,15.76 33.738,17.04 v1(33.756,17.04) ; v1(42.897,26.277) 42.897,27.885 S2.4 S2.3
  Bottom w0.152: v1(33.756,17.04) 33.756,17.088 42.897,26.229 v1(42.897,26.277)
"Pi RX": J3.01 U2.43 | length 32.1
  Top w0.152: v1(16.5,19.452) 17,18.952 17,15.063 v1(16.962,15.025) ; v1(27.732,15.33) 27.772,15.29 29.176,15.29 U2.43
  Bottom w0.152: J3.01 6.733,28 15.282,19.452 v1(16.5,19.452) ; v1(16.962,15.025) 16.969,15.018 27.367,15.018 27.68,15.33 v1(27.732,15.33)
"Pi TX": J3.02 U2.42 | length 34
  Top w0.152: v1(16.5,20.206) 16.567,20.206 17.592,19.18 v1(17.592,14.437) ; v1(27.39,14.437) 27.441,14.437 27.754,14.75 U2.42
  Bottom w0.152: J3.02 15.587,19.953 16.153,19.953 16.406,20.206 v1(16.5,20.206) ; v1(17.592,14.437) v1(27.39,14.437)
RESET: C4.2 J1.9 S1.3 S1.4 U2.7 | length 57.2
  Top w0.152: C4.2 24.586,21.134 24.586,20.815 24.496,20.725 24.496,20.244 24.687,20.053 24.687,19.28 U2.7 24.737,19.203 24.737,14.45 24.724,14.437 v1(24.724,13.857) 26.348,13.857 28.428,11.778 v1(33.401,11.778) ; v1(45.212,11.856) 46.306,12.95 S1.3 S1.4
  Bottom w0.152: J1.9@9.25,12.75 14.454,12.75 14.834,12.37 23.237,12.37 v1(24.724,13.857) ; v1(33.401,11.778) 33.44,11.817 45.173,11.817 v1(45.212,11.856)
SCK: U2.15 U3.13 | length 11.7
  Top w0.152: v1(19.58,16.748) 19.581,16.749 20.783,16.749 U2.15 ; v1(22.39,22.651) 22.39,23.563 23.776,24.949 24.035,24.949 U3.13
  Bottom w0.152: v1(19.58,16.748) 19.647,16.815 19.647,16.977 21.778,19.108 21.778,19.626 21.498,19.905 21.498,21.759 v1(22.39,22.651)
"USB_N": J2.A7 J2.B7 U2.32 | length 8.1
  Top w0.152: J2.B7 24.309,5.641 24.309,5.116 24.501,4.924 25.499,4.924 25.691,5.116 25.691,5.641 J2.A7 25.809,5.759 25.809,6.313 25.83,6.335 25.83,7.019 25.5,7.35 v1(25.5,7.366) ; v1(25.5,9.527) 25.687,9.714 25.687,10.72 U2.32
  Bottom w0.152: v1(25.5,7.366) v1(25.5,9.527)
USB_P: J2.A6 J2.B6 U2.33 | length 6.2
  Top w0.152: J2.A6 J2.B6 v1(25.25,6.575) ; U2.33 26.252,10.782 26.252,9.529 v1(26.254,9.527)
  Bottom w0.152: v1(25.25,6.575) 25.461,6.786 25.75,6.786 26.254,7.289 v1(26.254,9.527)
VUSB: J2.A4/B9 J2.B4/A9 | length 7.2
  Top w0.152: J2.A4/B9 22.834,5.884 22.834,6.309 24.471,7.946 25.74,7.946 27.166,6.52 27.166,5.884 J2.B4/A9
pads on no net: J2. J2.1 J2.2 J2.3 J2.4 J2.5 J2.6 J2.A8 J2.B8 MTH1.1 MTH2.1 MTH3.1 MTH4.1 U1.6 U1.8 U2.1 U2.2 U2.3 U2.4 U2.5 U2.6 U2.10 U2.11 U2.14 U2.18 U2.19 U2.20 U2.21 U2.22 U2.25 U2.26 U2.27 U2.28 U2.31 U2.34 U2.39 U2.40 U2.41 U2.45 U2.46 U3.2 U3.3 U3.10 U3.11

## Polygon pours and split planes (outlines as drawn)
3V3 on Top "3V3_L01_P001" (solid, pour order 1): -0.82,53.467 50.546,53.467 51.308,52.705 51.308,-0.508 2.373,-0.508 -1.397,5
12V on Top "12V_L01_P000" (solid, pour order 0): -4.572,50.607 -4.572,9.654 -4.045,9.128 18.407,13.407 19.192,21.561 26.131,28.5 26.131,34.26
GND on Bottom "GND_L02_P002" (solid, pour order 2): -6.477,55.499 -5.461,54.483 55.372,54.483 55.372,-1.905 52.451,-4.826 50.292,-2.667 -5.334,-2.667

## Silkscreen, mask and mechanical layers (free items; w line width, h text height)
Top Overlay:
  lines w0.254: 6.405,35.12 9.886,35.12 9.886,37.025 6.405,37.025 6.405,35.12 ; 10.988,5.517 14.957,5.517 14.957,7.323 10.988,7.323 10.988,5.517 ; 11.176,2.627 14.834,2.627 14.834,4.445 11.176,4.445 11.176,2.627 ; 33.401,39.37 41.021,39.37 41.021,44.831 33.401,44.831 33.401,39.37
  text "DEL / R = 3V3 / V = 12V" at 33.624,39.508 h1
  text "12V" at 6.853,35.547 h1
  text "3V3" at 11.593,5.926 h1
  text "GND" at 11.684,3.048 h1
Bottom Overlay:
  text "0" at 11.046,26.419 h3.5
  text ".Projet_Titre" at 29.055,22.565 h3.5
  text ".Projet_nom_du_cours" at 39.955,17.767 h2
  text ".Projet_Date" at 29.216,17.75 h0.91
  text ".Projet_Concepteur1" at 26.228,14.755 h2
  text "Conçu par :" at 35.292,14.755 h2
  text ".Projet_Concepteur2" at 26.228,12.469 h2
  text ".Projet_Concepteur3" at 26.228,10.183 h2
  text "JLCJLCJLCJLC" at 30.051,8.096 h0.8
Board Outline:
  the board outline again, w0.254

## Text inside footprints (layer, text, board x,y; h text height)
C1: Top Overlay "+" at 23.5,32.5 h1.22 r180
REV1: Bottom Overlay "PCB REV #" at 47.462,21.811 h1
SER1: Bottom Overlay "SERIAL #" at 46.899,16.952 h1
U3: Top Overlay "*" at 23.881,22.294 h1.27 r90; Top 3D Models "*" at 24.635,23.768 h1.27 r90